# Altium PCB PCB1.PcbDoc
Units mm, origin at the board's own origin, x right, y up, seen from the top; angles counter-clockwise.
Board outline 35.5 x 50 mm, 2 copper layers (Top Layer, Bottom Layer), stack 1.201 mm thick; 42 components, 31 nets, 181 pads, 100 vias.
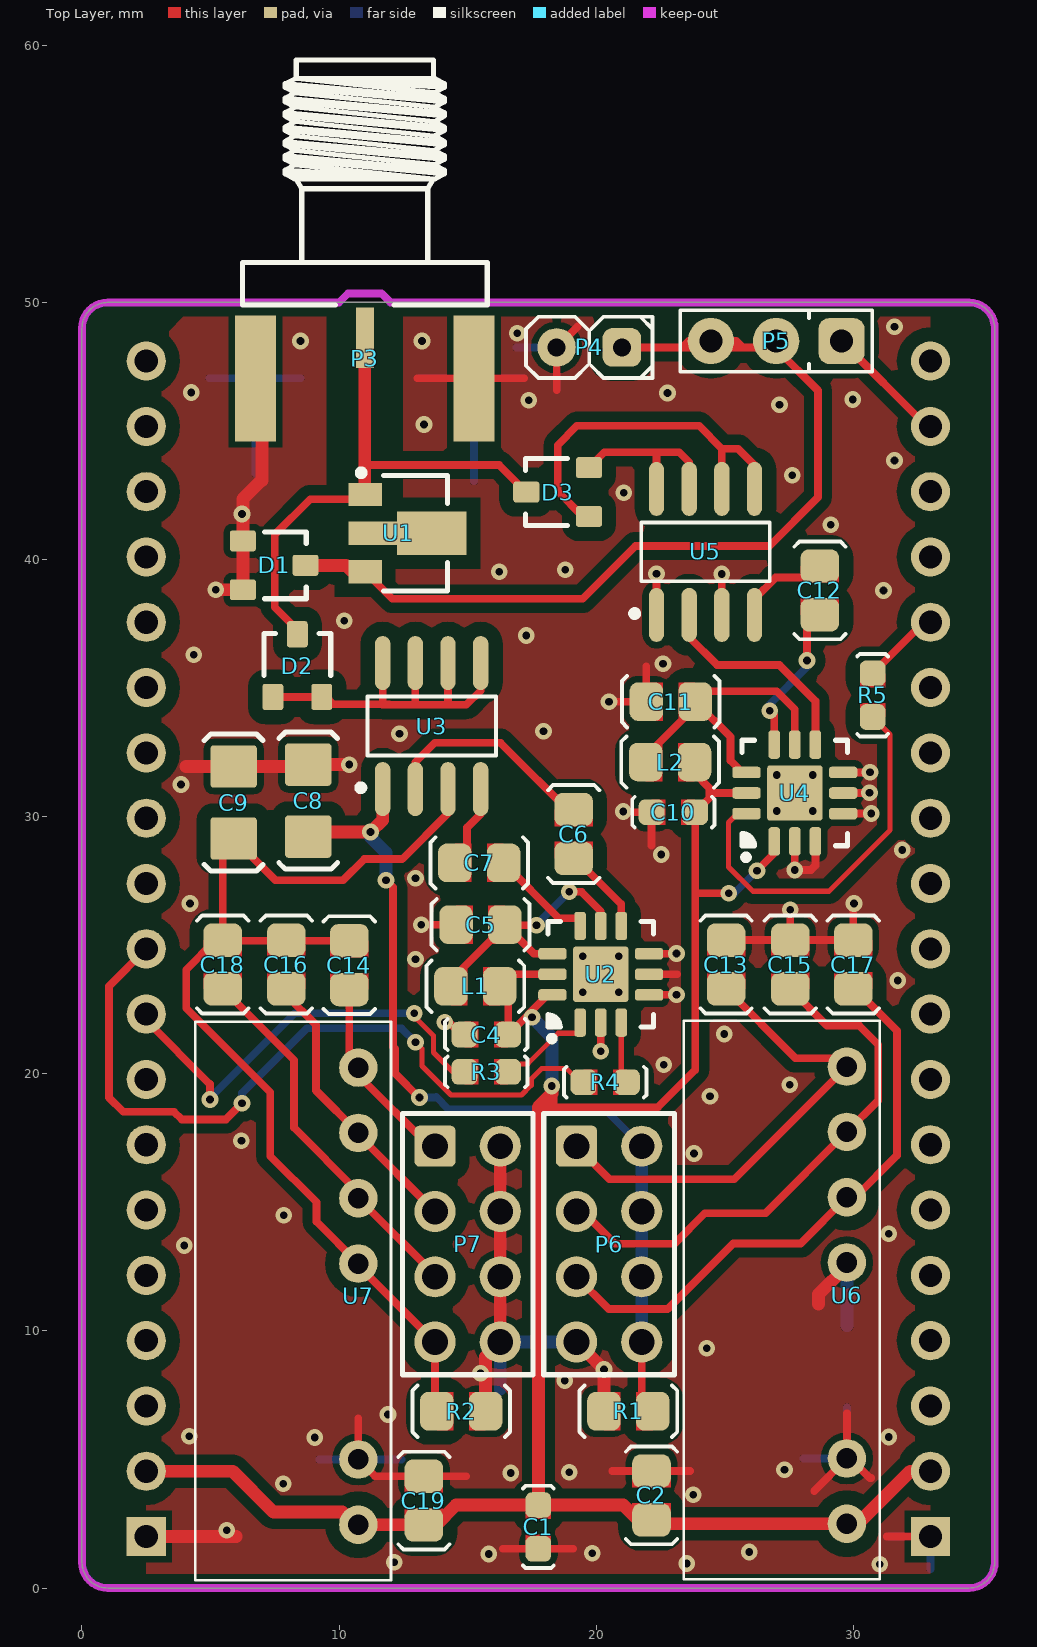
[diagram p0: Top Layer view]
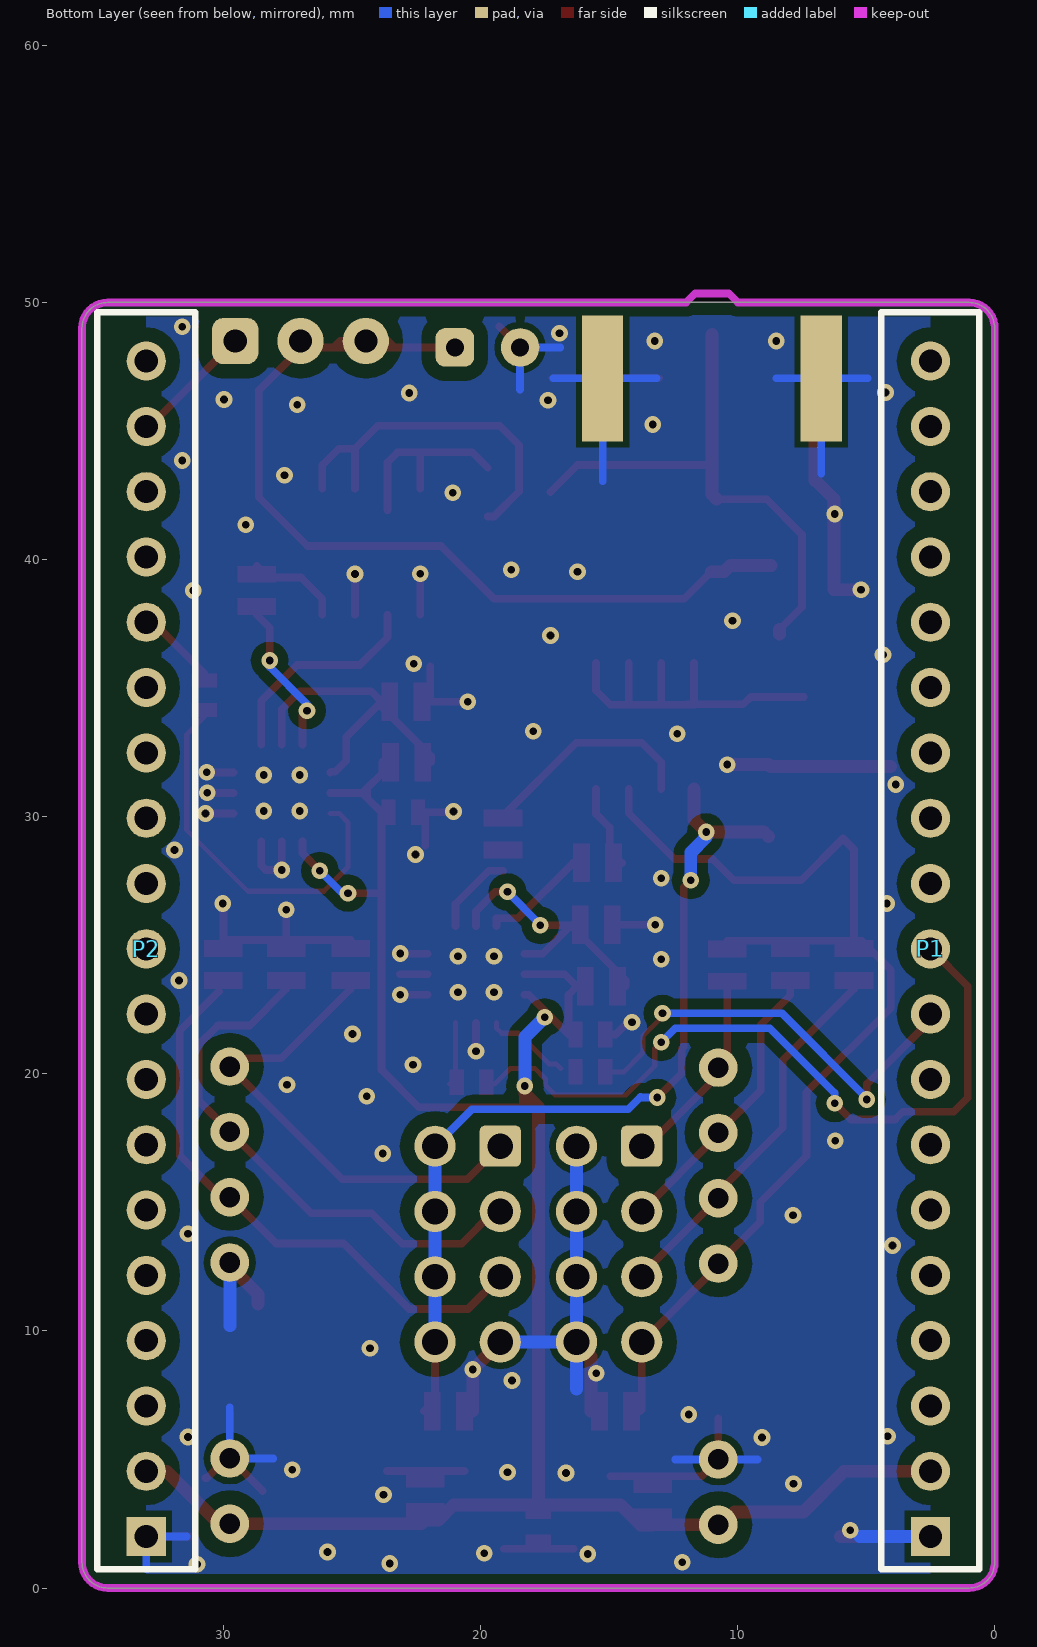
[diagram p1: Bottom Layer view, seen from below]
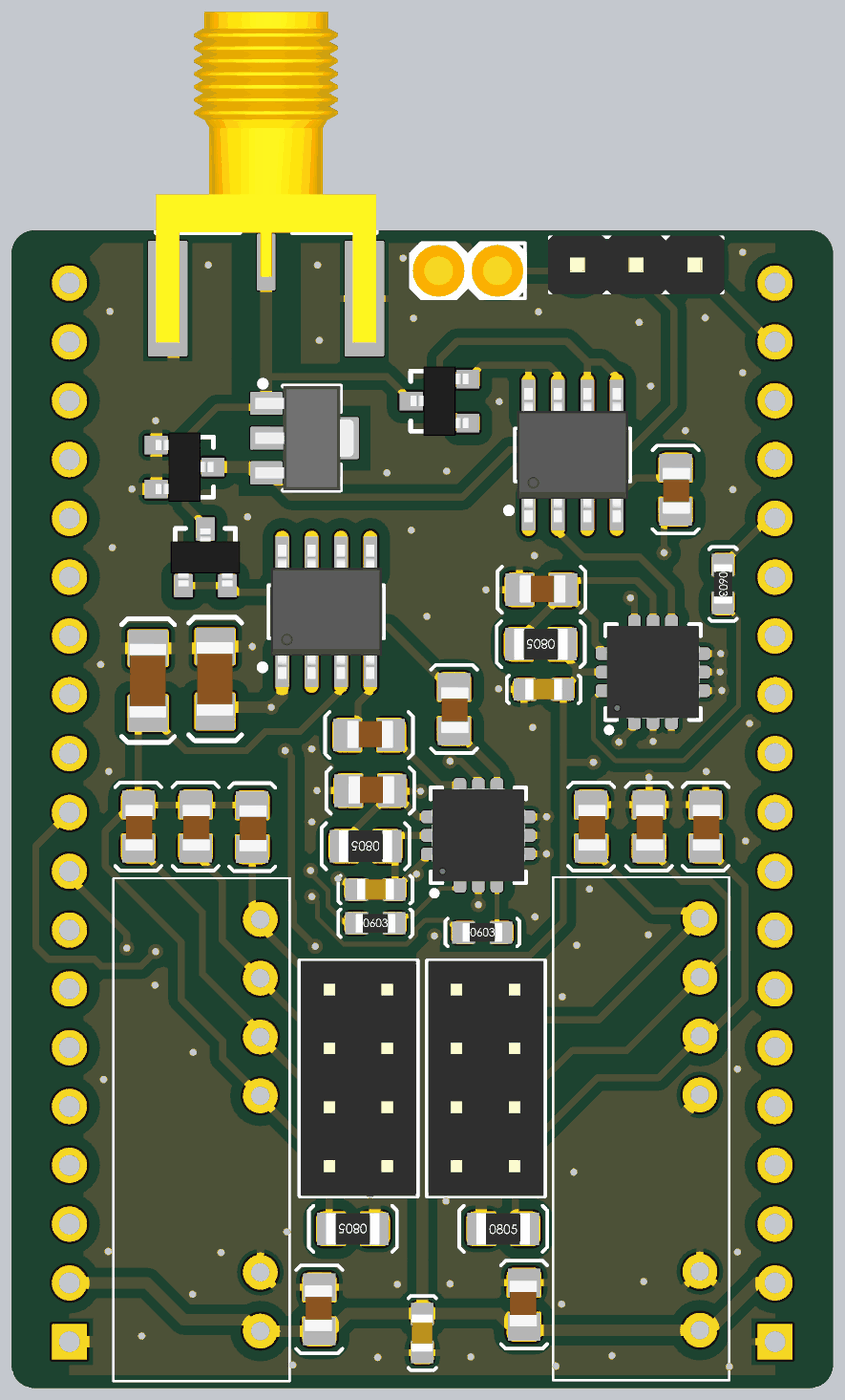
[diagram p2: 3D render of the assembled board from above, using the file's embedded part models]

## Layer stack, top to bottom
Top Solder: solder mask 0.0102, Solder Resist, Dk 3.5
Top Layer: signal copper 0.0356
Dielectric 1: dielectric 1.13, FR-4, Dk 4.8
Bottom Layer: signal copper 0.0356
Bottom Solder: solder mask 0.0102, Solder Resist, Dk 3.5

## Board outline
0,1 ccw(c1,1) 1,0 34.5,0 ccw(c34.5,1) 35.5,1 35.5,49 ccw(c34.5,49) 34.5,50 1,50 ccw(c1,49) 0,49

## Design rules (kind name [scope] priority, off if disabled: settings)
Clearance Clearance_2 [Name Like '*-1111'] p1: gap=1 ignorepadtopadclearanceinfootprint=FALSE except(0: Arc-Hole Track-Hole SMDPad-Hole THPad-Hole Via-Hole Fill-Hole Poly-Hole Region-Hole Text-Hole)
Clearance Clearance_1 [InPolygon vs IsPad] p2: gap=0.55 ignorepadtopadclearanceinfootprint=FALSE
Clearance Clearance_3 [InPolygon] p3: gap=0.4 ignorepadtopadclearanceinfootprint=FALSE
Clearance [All] p4: gap=0.25 ignorepadtopadclearanceinfootprint=FALSE except(0.3: Arc-SMDPad Arc-THPad Track-SMDPad Track-THPad SMDPad-Via THPad-Via)
HoleSize [All] p1 off: absolutevalues=TRUE maxlimit=2.54 minlimit=0.025 maxpercent=80.000 minpercent=20.000
PasteMaskExpansion [All] p1: expansion=0.05
PolygonConnect PolygonConnect_1 [All vs IsVia] p1: connectstyle=Direct reliefconductorwidth=0.254 reliefentries=4 polygonreliefangle="90 Angle" airgapwidth=0.254
PolygonConnect [All] p2: connectstyle=NoConnect reliefconductorwidth=0.254 reliefentries=4 polygonreliefangle="90 Angle" airgapwidth=0.254
RoomDefinition Sheet1 [InComponentClass('Sheet1')] p1 off: confinementstyle=ConfineIn formatcopy=TRUE lockcomponents=FALSE outline 82.9,54.325 56.5,54.325 56.5,46.025 82.9,46.025
RoutingVias [All] p1: holewidth=0.3 width=0.65 viastyle="Through Hole" minholewidth=0.3 minwidth=0.65 maxholewidth=0.3 maxwidth=0.65
SolderMaskExpansion [All] p1: expansion=0.102
Width [All] p1: maxlimit=3.048 minlimit=0.18 preferedwidth=0.18
28 further rules are at their usual default settings.

## Components (designator, comment, footprint, x,y, rotation, side; value= is the part's Value field where it differs from the comment)
C1 "0.1u" 0603RC 17.75,2.375 r90 top
C2 "1u" 0805RC 22.15,3.6 r90 top
C4 "0.1u" 0603RC 15.725,21.525 r0 top
C5 "1u" 0805RC 15.5,25.8 r0 top
C6 "10nF 100V" 0805RC 19.125,29.325 r270 top
C7 "10nF 100V" 0805RC 15.45,28.2 r0 top
C8 "1uF 100V" 1206RC 8.8,30.625 r270 top
C9 "1uF 100V" 1206RC 5.9,30.55 r270 top
C10 "0.1u" 0603RC 23,30.175 r0 top
C11 "1u" 0805RC 22.9,34.475 r0 top
C12 "10nF 100V" 0805RC 28.7,38.8 r270 top
C13 "10nF 100V" 0805RC 25.05,24.25 r270 top
C14 "10nF 100V" 0805RC 10.4,24.225 r270 top
C15 "10nF 100V" 0805RC 27.55,24.25 r270 top
C16 "10nF 100V" 0805RC 7.95,24.25 r270 top
C17 "10nF 100V" 0805RC 30,24.25 r270 top
C18 "10nF 100V" 0805RC 5.475,24.25 r270 top
C19 "1u" 0805RC 13.3,3.4 r90 top
D1 "BAV99" SOT-23 7.475,39.775 r270 top
D2 "BAV99" SOT-23 8.375,35.875 r0 top
D3 "BAV99" SOT-23 18.5,42.625 r90 top
L1 "BLM21PG121SN1D" 0805R 15.3,23.4 r180 top value="120 Ohm"
L2 "BLM21PG121SN1D" 0805R 22.875,32.125 r180 top value="120 Ohm"
P1 "PLS_2.54mm-19" PLS_2.54mm-19 2.5,2 r180 bottom
P2 "PLS_2.54mm-19" PLS_2.54mm-19 33,2 r180 bottom
P3 "SMA" AMPHENOL_132357-11 11,48.625 r270 top
P4 "SCSL-2" SCSL-2 21,48.25 r0 top
P5 "PLS-3" PLS-3 29.54,48.5 r0 top
P6 "PLD-8" PLD-8 20.5,13.375 r90 top
P7 "PLD-8" PLD-8 15,13.375 r90 top
R1 "100k" 0805R 21.25,6.875 r0 top
R2 "100k" 0805R 14.75,6.875 r180 top
R3 "100" 0603R 15.725,20.075 r0 top
R4 "100" 0603R 20.35,19.675 r0 top
R5 "100" 0603R 30.75,34.725 r270 top
U1 "MD0100N8-G" SOT89 12.975,41.025 r0 top
U2 "MD1210K6" "QFN-12 4x4mm" 20.175,23.87 r90 top
U3 "TC6320TG" SOIC127P600-8N 13.6,33.525 r90 top
U4 "MD1210K6" "QFN-12 4x4mm" 27.725,30.92 r90 top
U5 "TC6320TG" SOIC127P600-8N 24.25,40.3 r90 top
U6 "NMT0572SC" NMT0572SC 29.75,2.5 r90 top
U7 "NMT0572SC" NMT0572SC 10.75,2.46 r90 top

## Footprints (in the part's own frame and the unit in brackets; to place one, negate y for a bottom-side part, rotate by r counter-clockwise, add the part's x,y. Pads: shape width x height; smd on the part's side, far side on the other; paste and mask are expansions set on the pad)
0603R [mm] "Chip Resistor"
  rrect50% 1x1 smd paste-2 mask+0.076: 1(-0.85,0) 2(0.85,0)
  Top Layer region: 0.3,-0.5 0.85,-0.5 0.85,0.5 0.3,0.5
  Top Layer region: -0.85,-0.5 -0.3,-0.5 -0.3,0.5 -0.85,0.5
  silkscreen extent -1.6,-0.6 1.6,0.6, body extent -0.85,-0.4 0.85,0.4, height 0.56
0603RC [mm] "Chip Capacitor"
  rrect50% 1x1 smd paste-5 mask+0.076: 1(-0.85,0) 2(0.85,0)
  Top Layer region: 0.3,-0.5 0.85,-0.5 0.85,0.5 0.3,0.5
  Top Layer region: -0.85,-0.5 -0.3,-0.5 -0.3,0.5 -0.85,0.5
  silkscreen extent -1.6,-0.6 1.6,0.6, body extent -0.8,-0.44 0.8,0.46, height 0.79
0805R [mm] "Chip Resistor"
  rrect50% 1.3x1.5 smd paste-5 mask+0.102: 1(-0.95,0) 2(0.95,0)
  Top Layer region: -0.95,-0.75 -0.3,-0.75 -0.3,0.75 -0.95,0.75
  Top Layer region: 0.3,-0.75 0.95,-0.75 0.95,0.75 0.3,0.75
  silkscreen extent -1.9,-1 1.9,1, body extent -1.15,-0.67 1.15,0.68, height 0.76
0805RC [mm] "Chip Capacitor"
  rrect50% 1.3x1.5 smd paste-5 mask+0.102: 1(-0.95,0) 2(0.95,0)
  Top Layer region: -0.95,-0.75 -0.3,-0.75 -0.3,0.75 -0.95,0.75
  Top Layer region: 0.3,-0.75 0.95,-0.75 0.95,0.75 0.3,0.75
  silkscreen extent -1.9,-1 1.9,1, body extent -0.95,-0.56 1.05,0.64, height 1.2
1206RC [mm] "Chip Capacitor"
  rrect15% 1.65x1.8 smd paste-5: 1(-1.4,0) 2(1.4,0)
  silkscreen extent -2.67,-1.14 2.67,1.14, body extent -1.6,-0.81 1.6,0.79, height 1.6
AMPHENOL_132357-11 [mm]
  rect 2.35x0.7 smd: 1(0,0)
  rect 4.9x1.6 smd: 2(1.575,4.25) 2(1.575,-4.25)
  rect 4.9x1.6 smd far side: 2(1.575,4.25) 2(1.575,-4.25)
  silkscreen extent -10.81,-4.76 -1.28,4.76, body extent -10.8,-4.76 3.48,4.76, height 4.08
NMT0572SC [mm]
  round 1.5 hole 0.8: 1(0,0) 2(2.54,0) 5(10.16,0) 6(12.7,0) 7(15.24,0) 8(17.78,0)
  silkscreen extent -2.16,-1.27 19.56,6.35, body extent -2.16,-1.27 19.56,6.35, height 11.2
PLD-8 [mm] "Connector; Header; 4x2 Position"
  rrect25% 1.6x1.6 hole 1: 1(3.81,1.27)
  round 1.6 hole 1: 2(3.81,-1.27) 3(1.27,1.27) 4(1.27,-1.27) 5(-1.27,1.27) 6(-1.27,-1.27) 7(-3.81,1.27) 8(-3.81,-1.27)
  silkscreen extent -5.08,-2.54 5.08,2.54, body extent -5.08,-2.5 5.08,2.5, height 2.4
PLS-3 [mm]
  rrect50% 1.8x1.8 hole 0.9: 1(0,0)
  round 1.8 hole 0.9: 2(-2.54,0) 3(-5.08,0)
  silkscreen extent -6.27,-1.19 1.19,1.19, body extent -6.35,-1.27 1.27,1.27, height 8.64
PLS_2.54mm-19 [mil] "soldering pads"
  rect 60x60 hole 35.43: 1(0,0)
  round 60 hole 35.43: 2(0,100) 3(0,200) 4(0,300) 5(0,400) 6(0,500) 7(0,600) 8(0,700) 9(0,800) 10(0,900) 11(0,1000) 12(0,1100) 13(0,1200) 14(0,1300) 15(0,1400) 16(0,1500) 17(0,1600) 18(0,1700) 19(0,1800)
  silkscreen extent -75,-50 75,1875
"QFN-12 4x4mm" [mm] "0.8 mm pitch"
  rrect50% 1.1x0.45 smd: 1(-1.88,0.8) 2(-1.88,0) 3(-1.88,-0.8) 7(1.88,-0.8) 8(1.88,0) 9(1.88,0.8)
  rrect50% 0.45x1.1 smd: 4(-0.8,-1.88) 5(0,-1.88) 6(0.8,-1.88) 10(0.8,1.88) 11(0,1.88) 12(-0.8,1.88)
  rrect10% 2.15x2.15 smd: 17(0,0)
  silkscreen extent -2.6,-2.05 2.05,2.05, body extent -2,-2 2,2, height 0.92
SCSL-2 [mm] "2 pin SCSL connector (DS1002)"
  rrect50% 1.5x1.5 hole 0.7: 1(0,0)
  round 1.5 hole 0.7: 2(-2.54,0)
  silkscreen extent -3.73,-1.19 1.19,1.19, body extent -3.81,-1.27 1.27,1.27, height 4.4
SOIC127P600-8N [mm] "SOIC, 8-Leads, Body 4.9x3.9mm, Pitch 1.27mm, IPC Medium Density"
  oval 2.1x0.6 smd paste-5: 1(-2.45,1.905) 2(-2.45,0.635) 3(-2.45,-0.635) 4(-2.45,-1.905) 5(2.45,-1.905) 6(2.45,-0.635) 7(2.45,0.635) 8(2.45,1.905)
  silkscreen extent -2.52,-2.5 1.14,2.88, body extent -2.9,-2.4 2.9,2.4, height 1.75
SOT89 [mm]
  rect 1.3x0.9 smd: 1(-1.965,1.5) 3(-1.965,-1.5)
  rect 1.9x0.9 smd: 2(-1.665,0)
  rect 2.7x1.7 smd: 2(0.635,0)
  silkscreen extent -2.24,-2.25 1.24,2.47, body extent -2.44,-2.25 1.81,2.25, height 1.6
SOT-23 [mil] "SOT-23; 3 Leads; Body 3.0 x 2.6 mm, inc. leads (LxW max)"
  rrect25% 32x40 smd paste-196.85: 1(-37.4,-48) 2(37.4,-48) 3(0,48)
  silkscreen extent -51,-15 51,49, body extent -59,-49 59,49, height 44

## Part data
C1 C2 C4 C5 C6 C7 C8 C9 C10 C11 C12 C13 C14 C15 C16 C17 C18 C19: library part Cap, "Capacitor", LatestRevisionDate=17-Jul-2002, LatestRevisionNote="Re-released for DXP Platform.", PackageReference=RAD-0.3, Published=8-Jun-2000, Publisher="Altium Limited"
D1 D2 D3: library part BAV199, "Medium-speed Switching Double Diode with Low Leakage Current", ComponentLink1Description="Manufacturer Link", ComponentLink1URL=http://www.semiconductors.philips.com/, ComponentLink2Description=Datasheet, ComponentLink2URL=http://www.semiconductors.philips.com/acrobat/datasheets/BAV199_4.pdf, DatasheetVersion=12-Oct-2001, LatestRevisionDate=12-Dec-2006, LatestRevisionNote="IPC-7351 Footprint Added.", PackageDescription="3-Pin SOT-23 Package 0.95 mm Pitch, 2.3 mm Lead Span", PackageReference=SOT23, PackageVersion=May-1999, Published=17-Sep-2003, Publisher="Altium Limited"
L1 L2: library part Inductor, "Inductor", Code_IEC=1005, Code_JEITA=0402, LatestRevisionDate=29-May-2009, LatestRevisionNote="IPC-7351 Footprint Added.", PackageDescription="Chip Inductor", PackageReference=0402-A, Published=8-Jun-2000, Publisher="Altium Limited"
P3: library part AMPHENOL_132357-11, Manufacturer=AMPHENOL, Manufacturer Part Number=132357-11, Author="CERN DEM JLC", ComponentHeight=7.92mm, Component Type=Standard, CreateDate=5/14/2012, Family=SMA, HelpURL=\\cern.ch\dfs\Applications\Altium\Datasheets\AMPHENOL_132357-11.pdf, LatestRevisionDate=5/14/2012, Mounted=Yes, Part Description="SMA End Launch Jack for 1.58mm PCB, 50 Ohm, Flat Tab Contact", Part Number=AMPHENOL_132357-11, Pin Count=2, SMD=Yes, Socket=No, Status=None, Table=AMPHENOL
P4: library part "Header 2", "2-pin general header", LatestRevisionDate=17-Jul-2002, LatestRevisionNote="Re-released for DXP Platform.", Publisher="Altium Limited"
P5: library part "Header 3", "3-pin general header", LatestRevisionDate=17-Jul-2002, LatestRevisionNote="Re-released for DXP Platform.", Publisher="Altium Limited"
P6 P7: library part "Header 4X2", "Header, 4-Pin, Dual row", LatestRevisionDate=17-Jul-2002, LatestRevisionNote="Re-released for DXP Platform.", Publisher="Altium Limited"
R1 R2 R3 R4 R5: library part Res1, "Resistor", LatestRevisionDate=17-Jul-2002, LatestRevisionNote="Re-released for DXP Platform.", PackageReference=AXIAL-0.3, Published=8-Jun-2000, Publisher="Altium Limited"
U1: "3-Ultra-Sound HV Switch 1=A 2=COM 3=B", Case=SOT89, Manufacturer="Supertex inc.", Author="S. Jafar", ComponentHeight=1.6mm, Component Type=Standard, CreateDate=12/20/2015, Device=MD0100N8-G, LatestRevisionDate=1/6/2016, Manufacturer Part Number=MD0100N8-G, Mounted=Yes, PackageDescription="SOT89-3, 3-Leads, Body 2.44x4.5mm", Part Description="Ultra-Sound HV Switch", Part Number=MD0100N8-G, Pin Count=4, SMD=Yes, Socket=No, Table="Analog & Interface"
U2 U4: library part MD1210
U3 U5: library part TC6320, "N- and P-Channel  Enhancement-Mode MOSFET Pair"
U6 U7: library part "Header 8", "Horizontal", LatestRevisionDate=17-Jul-2002, LatestRevisionNote="Re-released for DXP Platform.", Publisher="Altium Limited"

## Via types
v1: diameter 0.65, hole 0.3, Top Layer to Bottom Layer, tented both sides, 92 vias
v2: diameter 0.65, hole 0.3, Top Layer to Bottom Layer, tented bottom, 8 vias

## Nets (pads, with @x,y where several pads share a name; then routed paths per layer and width w, separated by ;. In a path a pad name is that pad's centre, name@x,y a point inside that pad or via, vN(x,y) a via of type N, cw(c..) or ccw(c..) an arc to the next point about the centre after c; other vN are vias at no path point)
5V: C1.2 C2.1 C4.2 C10.2 C19.1 L1.1 L2.1 P1.2 P2.2 U2.11 U2.12 U4.1 U4.11 U6.1 U7.1 | length 84.6
  Top Layer w0.3: L1.1@16.58,23.07 L1.1@16.575,23.075 ; 17.75,18.7 18.35,18.7 ; v1@18.275,19.225 18.35,19.15 18.35,18.7 ; U2.12 18.12,23.07 C4.2 L1.1@16.575,23.075 ; U2.11 16.72,23.87 L1.1 L1.1@16.575,23.075 ; L2.1 23.825,31.69 24.4,31.115 ; v1(25.15,27.025) 23.85,27.025 ; U4.11 24.595,30.92 ; v1(26.25,27.9) 26.925,28.575 U4.1 ; 18.35,18.7 22.4,18.7 23.85,20.15 23.85,27.025 ; 23.85,27.025 C10.2 24.438,30.762 ; 24.4,31.115 24.4,30.8 24.438,30.762 ; 24.4,31.115 24.595,30.92 ; 24.438,30.762 24.595,30.92
  Top Layer w0.5: P1.2 5.86,4.54 7.45,2.95 10.125,2.95 10.615,2.46 U7.1 13.29,2.46 C19.1 13.775,2.45 14.55,3.225 C1.2 ; v1(18.275,19.525) 18.275,19.225 17.75,18.7 C1.2 ; P2.2 32.215,4.54 30.175,2.5 U6.1 22.3,2.5 C2.1 21.625,2.65 21.05,3.225 C1.2
  Bottom Layer w0.3: v1(25.15,27.025) 25.375,27.025 v1(26.25,27.9)
  Bottom Layer w0.5: v1(17.5,22.2) 18.275,21.425 v1(18.275,19.525)
DAMPER: P2.15 R5.1 | length 3.1
  Top Layer w0.3: R5.1 32.735,37.56 P2.15
GND: C1.1 C2.2 C4.1 C5.1 C8.1 C9.1 C10.1 C11.1 C13.1 C15.1 C17.1 C19.2 D1.1 D1.2 P1.1 P2.1 P3.2 P4.2 P6.7 P7.2 P7.4 P7.6 P7.8 R1.1 R2.1 U2.2 U2.4 U2.5 U2.6 U2.17 U4.2 U4.3 U4.4 U4.5 U4.6 U4.17 U5.1 U5.3 U6.2 U6.5 U7.2 | length 135.7
  Top Layer w0.3: 10.75,6.6 U7.2 11.4,4.35 C19.2 14.95,4.35 ; 13.05,47.05 15.25,47.05 17.2,47.05 ; v1(13.2,25.8) C5.1 ; v1@14.125,22.15 14.75,21.525 C4.1 ; 16.375,1.525 C1.1 19.1,1.525 ; 18.46,46.585 P4.2 19.275,49.065 ; v1(20.175,20.875) U2.2 ; v1(20.5,34.475) C11.1 21.95,35.85 ; 20.625,4.55 C2.2 23.65,4.55 ; v1(21.05,30.2) 21.075,30.175 C10.1 22.15,28.875 ; U2.4 v1(23.12,23.07) ; U2.5 23.145,23.87 ; U2.6 23.12,24.67 v1(23.125,24.675) ; U5.1 v1(22.345,39.445) ; U5.3 v1(24.885,39.435) ; C13.1 C15.1 ; v1(27.55,26.375) C15.1 ; U4.2 v1(27.725,27.925) 28.35,27.925 28.525,28.1 U4.3 ; 28.475,3.775 29.74,5.04 U6.2 ; U4.4 30.695,30.12 v1(30.7,30.125) ; U4.5 30.62,30.92 v1(30.625,30.925) ; U4.6 30.645,31.72 v1(30.65,31.725) ; 29.75,6.8 U6.2 ; v1(30.025,26.625) 30,26.6 C17.1 C15.1 ; 30.7,4.275 30.65,4.275 29.885,5.04 U6.2 ; 31.3,2 P2.1
  Top Layer w0.5: P1.1 6,2 ; 4.05,31.95 C9.1 8.725,31.95 C8.1 v1(10.4,32.025) ; v1(5.2,38.825) D1.2 D1.1 6.256,42.351 6.975,43.071 ; P3.2@6.75,47.175 6.281,46.706 6.281,45.969 7,45.25 7,43.071 ; R2.1 15.7,8.995 P7.8 P7.6 P7.4 P7.2 ; P6.7 v1(20.3,8.495) R1.1 ; 28.65,11.05 28.65,11.425 29.75,12.525 U6.5
  Bottom Layer w0.3: 4.95,47.05 P3.2@6.75,47.05 ; 6.75,43.35 P3.2@6.75,47.05 ; 8.5,47.05 P3.2@6.75,47.05 ; 9.225,5 U7.2 12.425,5 ; 13.15,47.05 P3.2@15.25,47.05 ; 15.25,43.05 P3.2@15.25,47.05 ; 16.9,48.25 P4.2 18.46,46.61 ; 17.175,47.05 P3.2@15.25,47.05 ; 28.06,5.04 U6.2 29.75,7.025 ; 31.425,2 P2.1 33,0.725
  Bottom Layer w0.5: P1.1 5.25,2 ; 16.27,7.745 P7.8 ; P7.2 P7.4 P7.6 P7.8 ; P6.7 P7.8 ; 29.75,10.2 U6.5
  other v1: 31.025,0.925 23.525,0.95 12.15,1 15.825,1.325 19.85,1.35 25.95,1.4 5.625,2.25 23.775,3.625 7.825,4.05 16.675,4.475 18.95,4.5 27.325,4.6 9.05,5.85 31.375,5.875 4.175,5.9 11.9,6.75 18.775,8.075 15.5,8.35 24.3,9.325 3.975,13.325 31.375,13.775 7.85,14.5 23.8,16.9 6.2,17.4 24.425,19.125 27.525,19.575 22.625,20.35 24.975,21.55 14.11,22 31.725,23.625 12.975,24.45 4.2,26.625 12.975,27.6 22.525,28.525 31.9,28.7 3.85,31.25 12.35,33.225 17.95,33.325 22.6,35.95 4.35,36.3 17.275,37.05 10.2,37.625 31.175,38.8 16.225,39.525 18.8,39.6 29.125,41.35 6.225,41.775 21.075,42.6 27.625,43.275 31.6,43.85 13.3,45.25 27.125,46.025 17.375,46.2 29.975,46.225 22.775,46.475 4.25,46.5 8.5,48.5 13.225,48.5 16.925,48.8 31.6,49.05
  other v2: 19.475,23.17 20.875,23.17 19.475,24.57 20.875,24.57 27.025,30.22 28.425,30.22 27.025,31.62 28.425,31.62
NetC5_2: C5.2 L1.2 U2.8 U2.10 | length 10.8
  Top Layer w0.3: L1.2 14.35,23.634 C5.2@16.45,25.734 ; v1(17.675,25.775) 16.491,25.775 C5.2@16.483,25.767 ; U2.10 17.58,24.67 C5.2@16.483,25.767 ; v1(18.95,27.075) 19.425,27.075 20.175,26.325 U2.8 ; C5.2@16.45,25.734 C5.2@16.483,25.767 ; C5.2@16.45,25.734 C5.2 C5.2@16.483,25.767
  Bottom Layer w0.3: v1(17.675,25.775) 17.675,25.8 v1(18.95,27.075)
NetC6_1: C6.1 U3.2 | length 8.9
  Top Layer w0.3: U3.2 12.965,32.115 13.725,32.875 16.275,32.875 19.125,30.025 C6.1@19.125,29.8
NetC6_2: C6.2 U2.7 | length 3.2
  Top Layer w0.3: C6.2@19.125,27.9 19.675,27.9 20.975,26.6 U2.7
NetC7_1: C7.1 U3.4 | length 3.3
  Top Layer w0.3: C7.1 14.975,28.675 14.975,29.575 15.505,30.105 U3.4
NetC7_2: C7.2 U2.9 | length 4.2
  Top Layer w0.3: C7.2 18.55,26.05 19.375,26.05 U2.9
NetC11_2: C11.2 L2.2 U4.8 U4.10 | length 12.5
  Top Layer w0.3: L2.2 21.925,32.35 23.85,34.275 C11.2 ; U4.10 25.815,31.75 25.65,31.75 25.225,32.175 25.225,33.1 C11.2 ; U4.8 27.725,34.175 27.025,34.875 24.25,34.875 C11.2
NetC12_1: C12.1 U5.4 | length 3.7
  Top Layer w0.3: U5.4 26.155,38.48 26.975,39.3 28.25,39.3 C12.1
NetC12_2: C12.2 U4.9 | length 5.9
  Top Layer w0.3: v1(26.75,34.125) 26.925,33.95 U4.9 ; v1(28.2,36.075) 28.2,37.35 C12.2
  Bottom Layer w0.3: v1(26.75,34.125) 26.75,34.375 28.2,35.825 v1(28.2,36.075)
NetC13_2: C13.2 P6.1 U6.8 | length 19
  Top Layer w0.3: P6.1@19.41,17.185 P6.1 20.515,15.9 25.37,15.9 U6.8 29.43,20.6 27.75,20.6 C13.2
NetC14_2: C14.2 P7.1 U7.8 | length 7.6
  Top Layer w0.3: C14.2 10.4,20.59 U7.8 10.75,19.95 13.515,17.185 P7.1
NetC15_2: C15.2 P6.3 U6.7 | length 21.1
  Top Layer w0.3: P6.3 19.48,14.645 20.73,13.395 23.045,13.395 24.225,14.575 26.585,14.575 U6.7 30.97,18.96 30.97,21.13 30.225,21.875 28.975,21.875 C15.2
NetC16_2: C16.2 P7.3 U7.7 | length 11
  Top Layer w0.3: C16.2 7.95,23.05 9.1,21.9 9.1,19.35 U7.7 10.75,17.625 P7.3
NetC17_2: C17.2 P6.5 U6.6 | length 22.5
  Top Layer w0.3: P6.5 20.485,10.85 22.775,10.85 25.325,13.4 27.95,13.4 U6.6 ; U6.6@30.075,15.2 31.7,16.825 31.7,21.675 C17.2@30.175,23.2
  Top Layer w0.5: U6.6 U6.6@30.075,15.2
NetC18_2: C18.2 P7.5 U7.6 | length 14.6
  Top Layer w0.3: C18.2 8.25,20.525 8.25,17.9 10.75,15.4 U7.6 13.73,12.18 P7.5
NetD1_3: D1.3 P4.1 P5.2 P5.3 U1.3 | length 37.5
  Top Layer w0.3: U1.3@11.025,39.525 12.075,38.475 19.475,38.475 21.525,40.525 26.725,40.525 28.625,42.425 28.625,46.575 27,48.2 P5.2 26.75,48.25 25.7,48.25 ; P4.1 23.35,48.25 ; 23.35,48.25 25.7,48.25 ; 23.35,48.25 23.6,48.5 P5.3 25.45,48.5 25.7,48.25
  Top Layer w0.5: D1.3 10.275,39.775 10.525,39.525 U1.3 U1.3@11.025,39.525
NetD2_1: D2.1 D2.2 U3.5 U3.6 U3.7 U3.8 | length 14.7
  Top Layer w0.3: D2.1 D2.2 9.494,34.656 9.78,34.37 11.695,34.37 11.675,34.35 12.965,34.35 ; U3.8 11.695,34.375 11.95,34.375 ; U3.7 12.965,34.35 ; U3.6 14.235,34.39 14.275,34.35 ; U3.5 15.505,34.905 14.95,34.35 14.275,34.35 ; 12.965,34.35 14.275,34.35
NetD2_3: D2.3 D3.3 P3.1 U1.1 | length 21.3
  Top Layer w0.3: D2.3@8.375,37.275 7.5,38.15 7.5,40.975 8.875,42.35 U1.1@10.815,42.35 ; 11,43.675 16.231,43.675 D3.3
  Top Layer w0.5: D2.3 D2.3@8.375,37.275 ; U1.1@10.815,42.35 11,42.535 11,43.675 P3.1 P3.1@11,48.75
NetD3_1: D3.1 U5.5 U5.6 | length 14.5
  Top Layer w0.3: D3.1 19.475,41.675 18.5,42.65 18.5,44.45 19.25,45.2 24,45.2 24.885,44.315 ; U5.6 24.885,44.315 ; U5.5 26.155,43.675 25.515,44.315 24.885,44.315
NetD3_2: D3.2 U5.7 U5.8 | length 7.6
  Top Layer w0.3: D3.2 20.319,44.175 22.3,44.175 ; U5.8 22.345,44.13 22.3,44.175 ; U5.7@23.615,41.915 U5.7 23.615,43.785 23.225,44.175 22.3,44.175
NetP2_18: P2.18 P5.1 | length 4.8
  Top Layer w0.3: P5.1 32.86,45.18 P2.18
NetR3_2: R3.2 U2.1 | length 3.4
  Top Layer w0.2: R3.2@16.875,20.2 17.062,20.388 17.338,20.388 18.525,21.575 19.175,21.575 19.375,21.775 U2.1
NetR4_2: R4.2 U2.3 | length 2.5
  Top Layer w0.2: U2.3 20.975,19.825 R4.2@21.2,19.6
NetR5_2: R5.2 U4.12 | length 14.9
  Top Layer w0.2: U4.12 25.495,30.12 25.15,29.775 25.15,28.045 26.095,27.1 29.05,27.1 31.425,29.475 31.425,33.2 R5.2
NetU4_7: U4.7 U5.2 | length 8.5
  Top Layer w0.3: U5.2 23.615,36.985 24.7,35.9 27.125,35.9 28.525,34.5 U4.7
PULSE_A: P1.9 R3.1 | length 17.1
  Top Layer w0.2: P1.9@2.5,22.075 P1.9 ; v1(12.925,22.35) 12.925,22.125 13.03,22.125 13.675,21.48 13.675,20.825 14.425,20.075 R3.1
  Top Layer w0.3: P1.9@2.5,22.075 4.975,19.6 v1(4.975,19)
  Bottom Layer w0.2: v1(4.975,19) v1@4.975,19.05
  Bottom Layer w0.3: v1@4.975,19.05 8.275,22.35 v1(12.925,22.35)
PULSE_B: P1.10 R4.1 | length 29.2
  Top Layer w0.2: v1(12.975,21.225) 13.225,20.975 13.225,20.3 14.35,19.175 16.056,19.175 17.094,19.175 17.475,19.556 17.475,19.8 17.875,20.2 18.85,20.2 19.45,19.6 R4.1@19.5,19.6
  Top Layer w0.3: P1.10 1.05,23.41 1.05,19.075 1.6,18.525 3.575,18.525 3.875,18.225 5.6,18.225 v1(6.225,18.85)
  Bottom Layer w0.3: v1(6.225,18.85) 6.225,19.25 8.75,21.775 12.425,21.775 v1(12.975,21.225)
V_NEG: C8.2 P6.2 P6.4 P6.6 P6.8 R1.2 U3.1 | length 35.4
  Top Layer w0.3: v1(11.825,27.525) 12.1,27.25 12.1,21.05 12.175,20.975 12.175,20.025 v1(13.125,19.075) ; P6.8 21.77,7.305 R1.2
  Top Layer w0.5: C8.2 8.975,29.4 v1(11.225,29.4) 11.695,29.87 U3.1
  Bottom Layer w0.3: v1(13.125,19.075) 13.75,19.075 13.775,19.1 14.25,18.625 20.33,18.625 P6.2
  Bottom Layer w0.5: v1(11.225,29.4) 11.225,29.2 11.825,28.6 v1(11.825,27.525) ; P6.8 P6.6 P6.4 P6.2
V_POS: C9.2 C14.1 C16.1 C18.1 P7.7 R2.2 U3.3 U7.5 | length 43.2
  Top Layer w0.3: C18.1 5.475,28.725 C9.2 7.525,27.525 10.15,27.525 10.975,28.35 12.45,28.35 14.235,30.135 U3.3 ; C14.1 5.175,25.175 4.05,24.05 4.05,22.55 7.325,19.275 7.325,16.8 9.125,15 9.125,14.245 U7.5 10.75,12.545 P7.7 13.73,6.945 R2.2
pads on no net: P1.3 P1.4 P1.5 P1.6 P1.7 P1.8 P1.11 P1.12 P1.13 P1.14 P1.15 P1.16 P1.17 P1.18 P1.19 P2.3 P2.4 P2.5 P2.6 P2.7 P2.8 P2.9 P2.10 P2.11 P2.12 P2.13 P2.14 P2.16 P2.17 P2.19 U1.2

## Polygon pours and split planes (outlines as drawn)
GND on Bottom Layer "GND_BOT" (solid, remove dead copper, pour order 2): 2.5,0.5 2.5,49.5 33,49.5 33,0.5
GND on Top Layer "GND_TOP" (solid, remove dead copper, pour order 0): 4,49.5 33,49.5 33,0.5 2.5,0.5 2.5,48

## Keep-outs
Keep-Out Layer:
  lines w0.3: 0,1 ccw(c1,1) 1,0 34.5,0 ccw(c34.5,1) 35.5,1 35.5,49 ccw(c34.5,49) 34.5,50 12,50 11.65,50.35 10.35,50.35 10,50 1,50 ccw(c1,49) 0,49 0,1

## Other copper
Top Layer:
  pour cut-out: 9.5,51 9.5,42 12.5,42 12.5,51

## Silkscreen, mask and mechanical layers (free items; w line width, h text height)
Shape:
  the board outline again, w0.15
Values-Top:
  text "120" at 22.075,31.85 h1.1
  text "120" at 14.45,23 h1.1